# EAGLE board working (EAGLE 6.5.0)
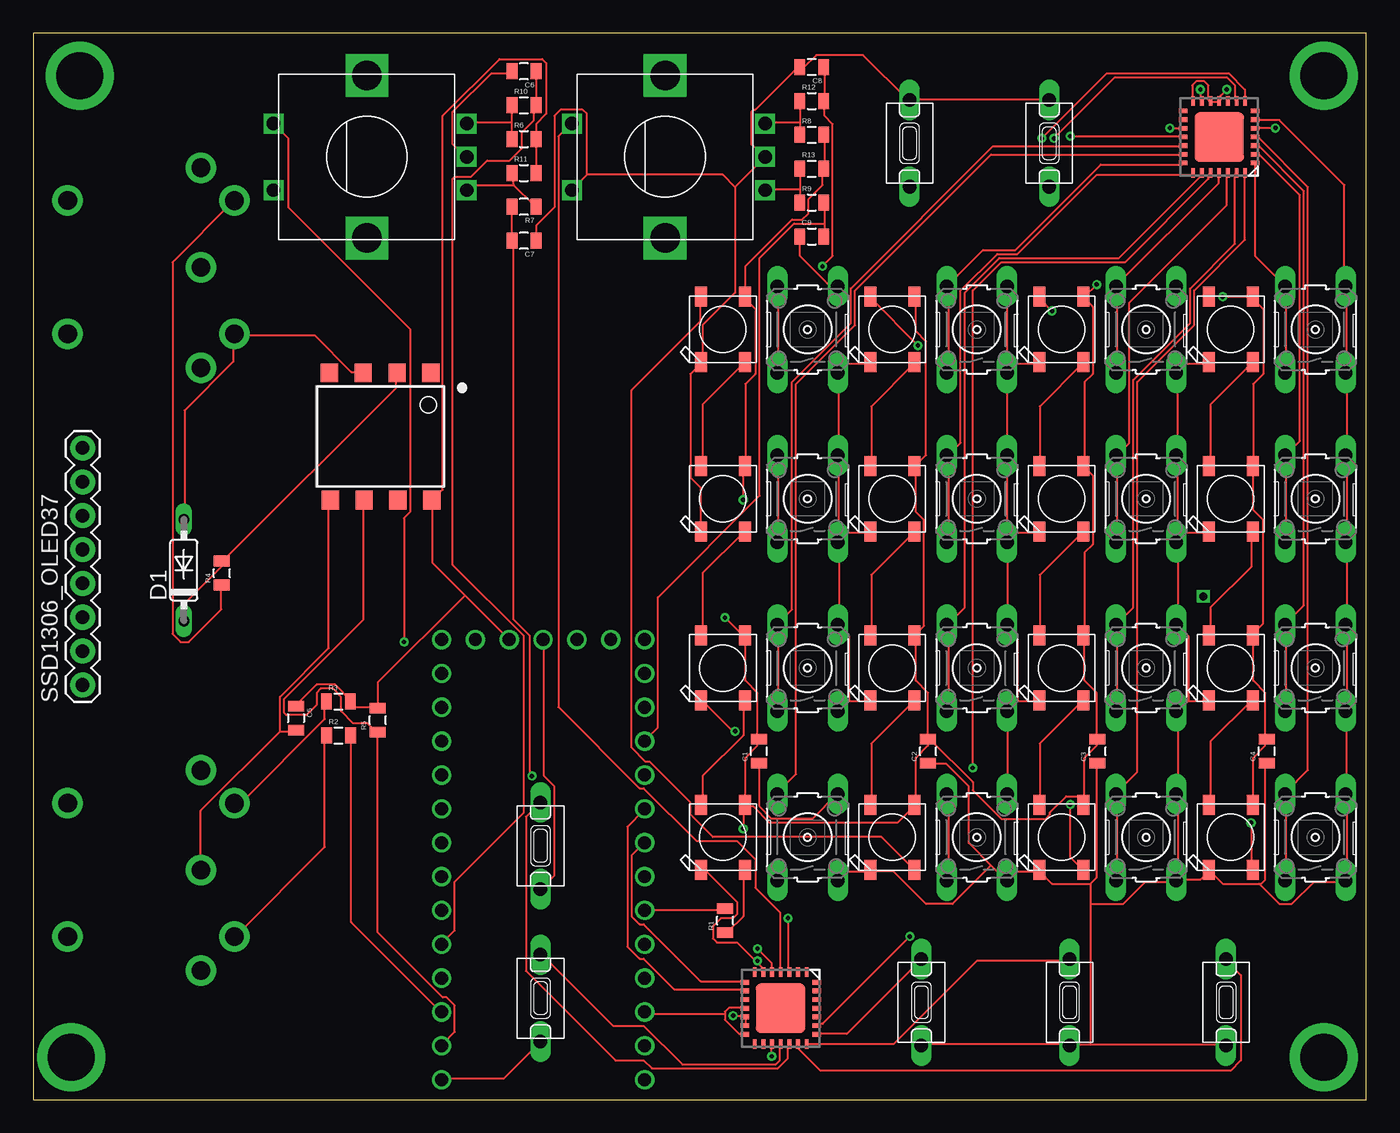
[diagram p0: board, top side]
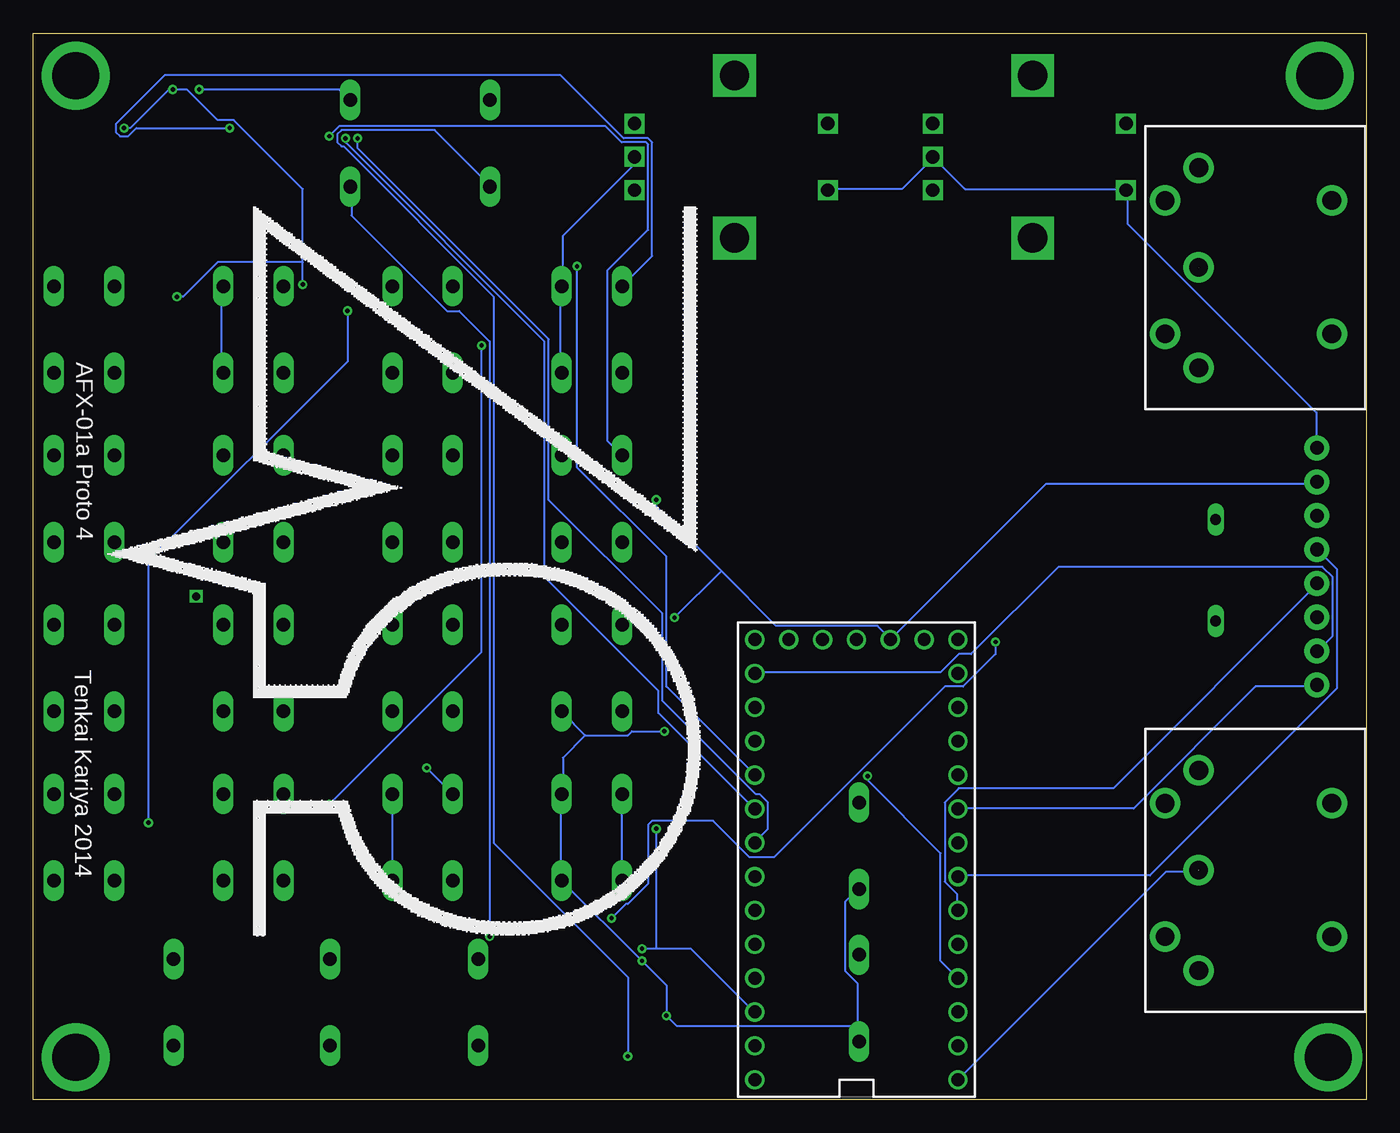
[diagram p1: board, bottom side, seen from below]

Size 100 x 80 mm. Coordinates in mm from the lower left corner, seen from the top.
Outline: 100,80 0,80 0,0 100,0 100,80
Copper layers (1*16): Top 0.0356mm / dielectric 1.5011mm / Bottom 0.0356mm
Design rules "LaenPCBOrder": minimum track width 6mil, minimum drill 13mil, track to track 6mil, track to pad 6mil, pad to pad 6mil, via to via 6mil, smd to smd 6mil, copper to edge 15mil, drill to drill 6mil, minimum pad ring 7mil, minimum via ring 7mil, stop-mask expansion 3mil, vias tented up to drill 0mil, thermal gap 10mil

## Footprints (pad centres in the part's own frame; a part is rotated, then mirrored left to right if it is on the bottom)
0805 = smd 0.8 x 1.2: 1 -0.9,0; 2 0.9,0
DO35-7 = drill 0.813 long: A 3.81,0; C -3.81,0
WS2812B = smd 1.5 x 0.9: 1-VDD 2.45,-1.65; 2-DOUT 2.45,1.65; 3-GND -2.45,1.65; 4-DIN -2.45,-1.65
QFN28-ML_6X6MM = smd 0.7 x 0.35: 1 -2.7,1.95; 2 -2.7,1.3; 3 -2.7,0.65; 4 -2.7,0; 5 -2.7,-0.65; 6 -2.7,-1.3; 7 -2.7,-1.95; 15 2.7,-1.95; 16 2.7,-1.3; 17 2.7,-0.65; 18 2.7,0; 19 2.7,0.65; 20 2.7,1.3; 21 2.7,1.95 | smd 0.35 x 0.7: 8 -1.95,-2.7; 9 -1.3,-2.7; 10 -0.65,-2.7; 11 0,-2.7; 12 0.65,-2.7; 13 1.3,-2.7; 14 1.95,-2.7; 22 1.95,2.7; 23 1.3,2.7; 24 0.65,2.7; 25 0,2.7; 26 -0.65,2.7; 27 -1.3,2.7; 28 -1.95,2.7 | smd 3.7 x 3.7: EXP 0,0
B3F-10XX = drill 1.016 long: 1 -3.251,2.261; 2 3.251,2.261; 3 -3.251,-2.261; 4 3.251,-2.261
B3F-10XX' = drill 1.016 long: 1 -3.251,2.261; 2 3.251,2.261
1X08_ROUND = drill 1.016 pad 1.88: 1 0,0; 2 2.54,0; 3 5.08,0; 4 7.62,0; 5 10.16,0; 6 12.7,0; 7 15.24,0; 8 17.78,0
ALPS_EC12E_SW = drill 1 square: A -2.5,-7.5; B 2.5,-7.5; C 0,-7.5; D -2.5,7; E 2.5,7 | drill 2.2 square: GND1 -6.1,0; GND2 6.1,0
8-SMD = smd 1.3 x 1.4: 1 -3.96,-4.96; 2 -1.42,-4.96; 3 1.12,-4.96; 4 3.66,-4.96; 5 3.59,4.58; 6 1.05,4.58; 7 -1.49,4.58; 8 -4.03,4.58
TEENSY_3.1_BASIC = drill 0.965: 0 -7.62,13.97; 1 -7.62,11.43; 2 -7.62,8.89; 3 -7.62,6.35; 3.3V 7.62,11.43; 3.3V1 -2.54,-16.51; 4 -7.62,3.81; 5 -7.62,1.27; 6 -7.62,-1.27; 7 -7.62,-3.81; 8 -7.62,-6.35; 9 -7.62,-8.89; 10 -7.62,-11.43; 11 -7.62,-13.97; 12 -7.62,-16.51; 13 7.62,-16.51; 14/A0 7.62,-13.97; 15/A1 7.62,-11.43; 16/A2 7.62,-8.89; 17/A3 7.62,-6.35; 18/A4 7.62,-3.81; 19/A5 7.62,-1.27; 20/A6 7.62,1.27; 21/A7 7.62,3.81; 22/A8 7.62,6.35; 23/A9 7.62,8.89; A14 5.08,-16.51; AGND 7.62,13.97; GND -7.62,16.51; GND1 0,-16.51; PGM 2.54,-16.51; VBAT -5.08,-16.51; VIN 7.62,16.51
DIN_5_FEMALE_SUPPORT = drill 1.4 pad 2.286: 1 7.94,3.6; 2 0.46,3.61; 3 -7.07,3.6; 4 5.47,6.13; 5 -4.53,6.12; 6 -4.53,-6.382; 7 5.478,-6.382

## Placement (x,y rotation side)
C1  100uF  [0805]  54.44,26.13 90 top
C2  100uF  [0805]  67.13,26.13 90 top
C3  100uF  [0805]  79.83,26.13 90 top
C4  100uF  [0805]  92.53,26.13 90 top
C5  100uF  [0805]  19.71,28.62 270 top
C6  0.01uF  [0805]  36.82,77.14 180 top
C7  0.01uF  [0805]  36.82,64.44 180 top
C8  0.01uF  [0805]  58.41,77.46 180 top
C9  0.01uF  [0805]  58.41,64.76 0 top
D1  1N4148DO35-7  [DO35-7]  11.29,39.72 90 top
L1  WS2812B  [WS2812B]  51.74,19.68 90 top
L2  WS2812B  [WS2812B]  51.74,32.38 90 top
L3  WS2812B  [WS2812B]  51.74,45.07 90 top
L4  WS2812B  [WS2812B]  51.74,57.77 90 top
L5  WS2812B  [WS2812B]  64.44,19.68 90 top
L6  WS2812B  [WS2812B]  64.44,32.38 90 top
L7  WS2812B  [WS2812B]  64.44,45.07 90 top
L8  WS2812B  [WS2812B]  64.44,57.77 90 top
L9  WS2812B  [WS2812B]  77.14,19.68 90 top
L10  WS2812B  [WS2812B]  77.14,32.38 90 top
L11  WS2812B  [WS2812B]  77.14,45.07 90 top
L12  WS2812B  [WS2812B]  77.14,57.77 90 top
L13  WS2812B  [WS2812B]  89.84,19.68 90 top
L14  WS2812B  [WS2812B]  89.84,32.38 90 top
L15  WS2812B  [WS2812B]  89.84,45.07 90 top
L16  WS2812B  [WS2812B]  89.84,57.77 90 top
MCP0  MCP23017ML  [QFN28-ML_6X6MM]  88.97,72.22 180 top
MCP1  MCP23017ML  [QFN28-ML_6X6MM]  56.07,6.85 270 top
R1  500  [0805]  51.9,13.43 90 top
R2  220  [0805]  22.9,27.31 0 top
R3  220  [0805]  22.89,29.85 0 top
R4  220  [0805]  14.15,39.5 90 top
R5  270  [0805]  25.83,28.47 90 top
R6  10k  [0805]  36.82,72.06 0 top
R7  10k  [0805]  36.82,66.98 180 top
R8  10k  [0805]  58.41,72.38 0 top
R9  10k  [0805]  58.41,67.3 0 top
R10  10k  [0805]  36.82,74.6 0 top
R11  10k  [0805]  36.82,69.52 0 top
R12  10k  [0805]  58.41,74.92 0 top
R13  10k  [0805]  58.41,69.84 0 top
S1  [B3F-10XX]  58.09,19.68 90 top
S2  [B3F-10XX]  58.09,32.38 90 top
S3  [B3F-10XX]  58.09,45.07 90 top
S4  [B3F-10XX]  58.09,57.77 90 top
S5  [B3F-10XX]  70.79,19.68 90 top
S6  [B3F-10XX]  70.79,32.38 90 top
S7  [B3F-10XX]  70.79,45.07 90 top
S8  [B3F-10XX]  70.79,57.77 90 top
S9  [B3F-10XX]  83.49,19.68 90 top
S10  [B3F-10XX]  83.49,32.38 90 top
S11  [B3F-10XX]  83.49,45.07 90 top
S12  [B3F-10XX]  83.49,57.77 90 top
S13  [B3F-10XX]  96.19,19.68 90 top
S14  [B3F-10XX]  96.19,32.38 90 top
S15  [B3F-10XX]  96.19,45.07 90 top
S16  [B3F-10XX]  96.19,57.77 90 top
SS1  [B3F-10XX']  40.31,7.61 90 top
SS2  [B3F-10XX']  40.31,19.04 90 top
SS3  [B3F-10XX']  91.74,7.29 90 top
SS4  [B3F-10XX']  80,7.29 90 top
SS5  [B3F-10XX']  68.88,7.29 90 top
SS6  [B3F-10XX']  73.96,71.75 270 top
SS7  [B3F-10XX']  63.49,71.75 270 top
SSD1306_OLED37  [1X08_ROUND]  3.7,31.11 90 top
SW1  EC12E_SW  [ALPS_EC12E_SW]  25.02,70.74 90 top
SW2  EC12E_SW  [ALPS_EC12E_SW]  47.4,70.74 90 top
U1  6N138M  [8-SMD]  25.87,49.56 180 top
U$1  TEENSY_3.1_BASIC  [TEENSY_3.1_BASIC]  38.24,18 180 bottom
U$2  MIDI_CONN_FEMALE_SUPPORT  [DIN_5_FEMALE_SUPPORT]  8.96,16.75 90 bottom
U$3  MIDI_CONN_FEMALE_SUPPORT  [DIN_5_FEMALE_SUPPORT]  8.96,61.97 90 bottom

## Library data of the parts
C1-C9 = SparkFun-Capacitors; PROD_ID: CAP-11625
D1 = diode
L1-L16 = adafruit
MCP0 MCP1 = microchip; MF: MICROCHIP; MPN: MCP23017-E/ML; OC_FARNELL: unknown; OC_NEWARK: 31K2957
R1-R13 = SparkFun-Passives
S1-S16 = switch-omron; MPN: B3F-1000; OC_FARNELL: 176432; OC_NEWARK: 36M3542
SS1-SS7 = TenkaiLibrary
SSD1306_OLED37 U$2 U$3 = SparkFun-Connectors
SW1 SW2 = switch-alps; MPN: EC12E2424407; OC_FARNELL: 1520813; OC_NEWARK: 74M1068
U1 = SparkFun-DiscreteSemi; PROD_ID: IC-09482
U$1 = Teensy_3_Series_Board_v1.0

## Nets
AGND: U$1.AGND
GND: C1.1 C2.1 C3.1 C4.1 C5.2 C6.2 C7.1 C8.2 C9.1 L1.3-GND L2.3-GND L3.3-GND L4.3-GND L5.3-GND L6.3-GND L7.3-GND L8.3-GND L9.3-GND L10.3-GND L11.3-GND L12.3-GND L13.3-GND L14.3-GND L15.3-GND L16.3-GND MCP0.6 MCP0.13 MCP1.6 MCP1.12 MCP1.13 S1.3 S1.4 S2.3 S2.4 S3.3 S3.4 S4.3 S4.4 S5.3 S5.4 S6.3 S6.4 S7.3 S7.4 S8.3 S8.4 S9.3 S9.4 S10.3 S10.4 S11.3 S11.4 S12.3 S12.4 S13.3 S13.4 S14.3 S14.4 S15.3 S15.4 S16.3 S16.4 SS1.1 SS2.1 SS3.1 SS4.1 SS5.1 SS6.1 SS7.1 SSD1306_OLED37.8 SW1.C SW1.D SW2.C SW2.D U1.5 U$1.GND U$1.GND1 U$2.2
N$1: L1.2-DOUT L2.4-DIN
N$2: L2.2-DOUT L3.4-DIN
N$3: L3.2-DOUT L4.4-DIN
N$4: L5.2-DOUT L6.4-DIN
N$5: L6.2-DOUT L7.4-DIN
N$6: L7.2-DOUT L8.4-DIN
N$7: L9.2-DOUT L10.4-DIN
N$8: L10.2-DOUT L11.4-DIN
N$9: L11.2-DOUT L12.4-DIN
N$10: L13.2-DOUT L14.4-DIN
N$11: L14.2-DOUT L15.4-DIN
N$12: L15.2-DOUT L16.4-DIN
N$13: L4.2-DOUT L5.4-DIN
N$14: R2.1 U$2.5
N$15: R2.2 U$1.1
N$16: MCP0.20 S1.1 S1.2
N$17: MCP0.19 S2.1 S2.2
N$18: MCP0.18 S3.1 S3.2
N$19: MCP0.17 S4.1 S4.2
N$20: R1.2 U$1.21/A7
N$21: MCP0.24 S5.1 S5.2
N$22: MCP0.23 S6.1 S6.2
N$23: MCP0.22 S7.1 S7.2
N$24: MCP0.21 S8.1 S8.2
N$25: MCP0.28 S9.1 S9.2
N$26: MCP0.27 S10.1 S10.2
N$27: MCP0.26 S11.1 S11.2
N$28: MCP0.25 S12.1 S12.2
N$29: MCP0.4 S13.1 S13.2
N$30: MCP0.3 S14.1 S14.2
N$31: MCP0.2 S15.1 S15.2
N$32: MCP0.1 S16.1 S16.2
N$33: MCP0.8 MCP1.8 U$1.19/A5
N$34: MCP0.9 MCP1.9 U$1.18/A4
N$35: SSD1306_OLED37.1 U$1.7
N$36: SSD1306_OLED37.2 U$1.14/A0
N$37: SSD1306_OLED37.4 U$1.4
N$38: SSD1306_OLED37.5 U$1.5
N$39: L12.2-DOUT L13.4-DIN
N$40: R3.1 U$2.4
N$41: R8.1 R12.1 SW2.B
N$42: R9.1 R13.1 SW2.A
N$45: MCP1.4 SW2.E
N$46: MCP1.3 SW1.E
N$47: MCP1.17 SS7.2
N$48: MCP1.18 SS1.2
N$49: MCP1.19 SS2.2
N$50: MCP1.23 SS6.2
N$51: MCP1.22 SS5.2
N$52: MCP1.20 SS3.2
N$53: MCP1.21 SS4.2
N$54: L1.4-DIN R1.1
N$55: L8.2-DOUT L9.4-DIN
N$56: R4.1 U$3.4
N$57: D1.C R4.2 U1.2
N$58: D1.A U1.3 U$3.5
N$59: R5.1 U1.6 U$1.0
N$60: C6.1 R10.2 U$1.3
N$61: R6.1 R10.1 SW1.B
N$62: R7.1 R11.1 SW1.A
N$63: C7.2 R7.2 U$1.2
N$64: C8.1 R12.2 U$1.17/A3
N$65: C9.2 R9.2 U$1.16/A2
VBAT: U$1.VBAT
VCC: C1.2 C2.2 C3.2 C4.2 C5.1 L1.1-VDD L2.1-VDD L3.1-VDD L4.1-VDD L5.1-VDD L6.1-VDD L7.1-VDD L8.1-VDD L9.1-VDD L10.1-VDD L11.1-VDD L12.1-VDD L13.1-VDD L14.1-VDD L15.1-VDD L16.1-VDD MCP0.5 MCP0.11 MCP0.12 MCP0.14 MCP1.5 MCP1.11 MCP1.14 R3.2 R5.2 R6.2 R8.2 R11.2 R13.2 SSD1306_OLED37.7 U1.8 U$1.3.3V U$1.3.3V1
VIN: U$1.VIN

## Tracks (layer width: path | path; a pad name or v marks a point on that pad's centre or on a via)
GND  (via drill 0.33)
  Top 0.152: 41.53,69.38 41.53,73.95 41.22,74.26 39.55,74.26 39.09,73.8 39.09,66.94 37.72,65.57 37.72,64.51 C7.1 | 41.53,69.38 40.46,68.32 SW2.D | C6.2 35.89,77 34.37,77 31.47,74.11 31.47,71.67 32.39,70.75 SW1.C | L3.3-GND 50.06,42.71 50.06,45.91 49.3,46.67 49.3,54.45 50.06,55.21 L4.3-GND 50.22,55.36 50.22,58.1 52.65,60.54 52.65,68.47 | v87.55,75.78 87.55,75.02 MCP0.13 | SS6.1 76.12,75.02 65.76,75.02 SS7.1 65.61,75.02 62.26,78.37 58.75,78.37 57.84,77.46 C8.2 57.38,77.46 54.18,74.26 54.03,74.26 53.87,74.11 53.87,71.67 54.79,70.75 SW2.C 54.79,70.6 52.65,68.47 | 41.53,69.38 51.74,69.38 52.65,68.47 | 18.52,27.62 19.58,27.62 C5.2 | 18.52,27.62 12.57,21.68 12.57,17.26 U$2.2 | 18.52,27.62 18.52,30.22 22.17,33.87 22.17,44.85 U1.5 | U$1.GND 30.71,1.57 35.28,1.57 38.02,4.31 SS1.1 | U$1.GND1 38.33,34.48 38.33,24.27 39.09,23.51 39.09,16.8 38.18,15.89 SS2.1 | 54.18,10.4 52.81,11.78 51.28,11.78 50.98,12.08 50.98,13 51.59,13.6 52.5,13.6 52.81,13.91 52.81,14.82 50.52,17.11 50.22,17.11 L1.3-GND | 54.18,10.4 54.64,9.95 54.64,9.64 MCP1.6 | MCP1.13 53.42,5.68 53.42,6.14 MCP1.12 53.26,6.29 v52.5,6.29 | S1.3 61.04,17.11 62.71,17.11 L5.3-GND 62.87,17.11 64.54,17.11 66.98,14.67 68.96,14.67 71.86,17.57 | v54.33,10.4 54.18,10.4 | C1.1 54.48,25.19 54.48,21.99 55.4,21.07 58.45,21.07 60.27,22.9 S1.4 | v52.65,27.62 52.5,27.62 50.22,29.91 L2.3-GND | 61.19,29.91 62.71,29.91 L6.3-GND | 61.19,29.91 60.43,29.15 S2.3 | C9.1 57.53,64.66 57.53,63.29 59.66,61.15 60.27,61.15 S4.4 | L8.3-GND 62.71,55.21 61.04,55.21 S4.3 60.43,54.45 60.43,48.35 S3.4 60.43,48.2 60.43,43.17 61.04,42.56 | 61.04,42.56 62.71,42.56 L7.3-GND
  Top 0.152: 61.04,42.56 60.43,41.95 S3.3 | S3.3 60.43,41.8 60.43,35.7 S2.4 61.19,34.79 61.19,29.91 | 61.04,42.56 S3.3 | MCP0.6 91.67,73.5 93.5,73.5 98.37,68.62 98.37,61.15 S16.4 98.53,61 98.53,54.6 S16.3 98.53,54.45 98.53,48.35 S15.4 98.53,48.2 98.53,41.95 S15.3 98.53,41.8 98.53,35.7 S14.4 98.53,35.55 98.53,29.15 S14.3 98.53,29 98.53,23.05 S13.4 98.53,22.9 98.53,16.5 S13.3 98.37,16.35 96.09,16.35 94.41,14.67 93.5,14.67 91.97,16.2 | 91.97,16.2 89.23,16.2 88.32,17.11 L13.3-GND 88.16,17.11 87.55,16.5 85.88,16.5 | 91.97,16.2 92.13,16.2 92.43,16.5 92.43,25.19 C4.1 | L16.3-GND 88.16,55.21 86.49,55.21 85.88,54.6 S12.3 85.88,54.45 85.88,48.35 S11.4 85.88,48.2 85.88,43.17 86.49,42.56 | 86.64,29.91 88.16,29.91 L14.3-GND | 86.64,29.91 85.88,29.15 S10.3 85.88,29 85.88,23.05 S9.4 85.88,22.9 85.88,16.5 | 86.49,42.56 88.16,42.56 L15.3-GND | 86.49,42.56 S11.3 85.88,41.8 85.88,35.7 S10.4 85.88,35.55 86.64,34.79 86.64,29.91 | 85.88,16.5 S9.3 85.73,16.35 83.44,16.35 81.76,14.67 79.32,14.67 | SS5.1 66.68,4.16 77.65,4.16 SS4.1 77.8,4.16 79.32,4.16 | 79.32,4.16 89.38,4.16 SS3.1 | 79.32,16.2 79.78,16.65 79.78,25.19 C3.1 | 79.32,16.2 76.43,16.2 75.51,17.11 L9.3-GND 75.36,17.11 73.69,17.11 73.08,16.5 S5.3 72.92,16.5 71.86,17.57 | 71.86,17.57 70.18,19.24 70.18,23.51 68.5,25.19 67.28,25.19 C2.1 | 73.69,55.21 75.36,55.21 L12.3-GND | 73.69,55.21 73.08,54.6 S8.3 | 73.69,55.21 73.08,55.82 73.08,61 S8.4 | 73.69,55.21 S8.3 | 73.84,29.91 75.36,29.91 L10.3-GND | 73.84,29.91 S6.3 73.08,29 73.08,23.05 S5.4 | 73.69,42.56 75.36,42.56 L11.3-GND | 73.69,42.56 73.08,41.95 S7.3 | S7.3 73.08,41.8 73.08,35.7 S6.4 73.08,35.55 73.84,34.79 73.84,29.91
  Top 0.152: 73.69,42.56 73.08,43.17 73.08,48.2 S7.4 73.08,48.35 73.08,54.45 S8.3 | 73.69,42.56 S7.3 | 79.32,16.2 79.32,14.67 | 79.32,14.67 79.32,4.16
  Bottom 0.152: SSD1306_OLED37.8 3.73,48.96 3.73,51.55 17.91,65.73 17.91,68.16 SW1.D 18.06,68.32 30.1,68.32 32.39,70.6 SW1.C 32.54,70.6 34.82,68.32 40.31,68.32 SW2.D | v87.55,75.78 77.04,75.78 76.28,75.02 SS6.1 | 38.18,5.53 38.18,8.73 39.09,9.64 39.09,14.82 38.18,15.74 SS2.1 | 38.18,5.53 38.18,4.46 SS1.1 38.18,5.53 | U$2.2 12.57,17.11 15.01,17.11 30.56,1.57 U$1.GND | v52.65,27.62 55.09,27.62 55.4,27.32 58.6,27.32 | 58.6,27.32 60.27,29 S2.3 | 58.6,27.32 60.27,25.64 60.27,23.05 S1.4 60.43,22.9 60.43,16.5 S1.3 v54.33,10.4 52.5,8.58 v52.5,6.29 51.74,5.53 38.18,5.53 | S4.3 60.43,54.6 60.43,61 S4.4 60.27,61.15 60.27,64.81 54.94,70.15 54.94,70.6 SW2.C | S12.4 85.88,61 85.88,54.6 S12.3 | S5.3 73.08,16.5 73.08,22.9 S5.4
N$1
  Top 0.152: L1.2-DOUT 50.22,22.14 50.22,24.27 53.26,27.32 53.26,29.91 L2.4-DIN
N$2
  Top 0.152: L2.2-DOUT 50.22,34.94 50.22,39.51 53.26,42.56 L3.4-DIN
N$3
  Top 0.152: L3.2-DOUT 50.22,47.59 50.22,52.16 53.26,55.21 L4.4-DIN
N$4
  Top 0.152: L5.2-DOUT 62.87,22.14 62.87,26.71 66.07,29.91 L6.4-DIN
N$5
  Top 0.152: L6.2-DOUT 62.87,34.94 62.87,39.36 66.07,42.56 L7.4-DIN
N$6
  Top 0.152: L7.2-DOUT 62.87,47.59 62.87,52.01 66.07,55.21 L8.4-DIN
N$7
  Top 0.152: L9.2-DOUT 75.51,22.14 75.51,26.71 78.71,29.91 L10.4-DIN
N$8
  Top 0.152: L10.2-DOUT 75.51,34.94 75.51,39.36 78.71,42.56 L11.4-DIN
N$9
  Top 0.152: L11.2-DOUT 75.51,47.59 75.51,52.01 78.71,55.21 L12.4-DIN
N$10
  Top 0.152: L13.2-DOUT 88.32,22.14 88.32,26.86 91.36,29.91 L14.4-DIN
N$11
  Top 0.152: L14.2-DOUT 88.32,34.94 88.32,36.92 91.36,39.97 91.36,42.56 L15.4-DIN
N$12
  Top 0.152: L15.2-DOUT 88.32,47.59 88.32,52.16 91.36,55.21 L16.4-DIN
N$13
  Top 0.152: L4.2-DOUT 50.06,60.09 50.06,58.41 44.88,53.23 44.88,26.41 45.95,25.34 46.25,25.34 49.3,22.29 49.3,21.38 50.98,19.7 63.63,19.7 66.07,17.26 L5.4-DIN
N$14
  Top 0.152: R2.1 21.87,27.17 21.87,18.94 15.16,12.23 U$2.5
N$15
  Top 0.152: R2.2 23.85,27.17 23.85,13.3 30.56,6.59 U$1.1
N$16
  Top 0.152: MCP0.20 86.18,70.91 71.86,70.91 61.65,60.7 61.65,58.1 57.23,53.69 57.23,24.43 55.85,23.05 S1.2
  Bottom 0.152: S1.1 55.85,16.5 55.85,22.9 S1.2
N$17
  Top 0.152: MCP0.19 86.18,71.52 72.01,71.52 61.34,60.85 61.34,58.26 56.92,53.84 56.92,36.77 55.85,35.7 S2.2 55.85,35.55 55.85,29.15 S2.1
N$18  (via drill 0.33)
  Top 0.152: v77.8,72.28 86.18,72.28 MCP0.18 | S3.1 55.85,41.95 55.85,48.2 S3.2
  Bottom 0.152: v77.8,72.28 77.04,73.04 57.07,73.04 55.85,71.82 54.03,71.82 53.87,71.67 53.87,65.27 56.92,62.22 56.92,49.42 S3.2
N$19  (via drill 0.33)
  Top 0.152: v85.27,72.89 86.18,72.89 MCP0.17 | S4.1 55.85,54.6 55.85,61 S4.2
  Bottom 0.152: v85.27,72.89 92.28,72.89 92.89,72.28 93.5,72.28 93.8,72.58 93.8,73.19 90.14,76.85 60.43,76.85 55.7,72.13 53.87,72.13 53.57,71.82 53.57,63.29 S4.2
N$20
  Top 0.152: R1.2 51.89,14.21 45.95,14.21 U$1.21/A7
N$21  (via drill 0.33)
  Top 0.152: v70.49,24.88 70.49,60.7 72.62,62.83 81.92,62.83 88.16,69.08 88.16,69.38 MCP0.24 | S5.1 68.66,16.5 68.66,22.9 S5.2
  Bottom 0.152: S5.2 v70.49,24.88
N$22
  Top 0.152: MCP0.23 87.55,69.38 87.55,69.23 81.46,63.13 72.47,63.13 69.88,60.54 69.88,36.92 68.66,35.7 S6.2 68.66,35.55 68.66,29.15 S6.1
N$23
  Top 0.152: MCP0.22 86.94,69.38 79.78,69.38 73.84,63.44 72.31,63.44 69.57,60.7 69.57,49.27 68.66,48.35 S7.2 68.66,48.2 68.66,41.95 S7.1
N$24
  Top 0.152: MCP0.21 86.18,70.15 80.09,70.15 73.69,63.74 71.25,63.74 S8.2 68.66,61 68.66,54.6 S8.1
N$25
  Top 0.152: MCP0.28 90.91,69.38 90.91,64.51 87.1,60.7 87.1,58.1 82.83,53.84 82.83,24.58 81.31,23.05 S9.2 81.31,22.9 81.31,16.5 S9.1
N$26
  Top 0.152: MCP0.27 90.14,69.38 90.14,64.2 86.79,60.85 86.79,58.26 82.52,53.99 82.52,36.92 S10.2 81.31,35.55 81.31,29.15 S10.1
N$27
  Top 0.152: MCP0.26 89.54,69.38 89.54,67.1 82.22,59.78 82.22,49.27 81.31,48.35 S11.2 81.31,48.2 81.31,41.95 S11.1
N$28
  Top 0.152: MCP0.25 88.93,69.38 88.93,68.77 81.31,61.15 S12.2 81.31,61 81.31,54.6 S12.1
N$29
  Top 0.152: MCP0.4 91.67,72.13 91.97,72.13 95.63,68.47 95.63,24.73 93.95,23.05 S13.2 93.95,22.9 93.95,16.5 S13.1
N$30
  Top 0.152: MCP0.3 91.67,71.52 91.97,71.52 95.33,68.16 95.33,37.07 93.95,35.7 S14.2 93.95,35.55 93.95,29.15 S14.1
N$31
  Top 0.152: MCP0.2 91.67,70.91 91.97,70.91 95.02,67.86 95.02,49.42 S15.2 93.95,48.2 93.95,41.95 S15.1
N$32
  Top 0.152: MCP0.1 91.67,70.15 91.67,63.29 S16.2 93.95,61 93.95,54.6 S16.1
N$33  (via drill 0.33)
  Top 0.152: MCP1.8 53.26,8.88 50.06,8.88 45.8,13.15 45.49,13.15 44.88,13.76 44.88,18.33 45.8,19.24 U$1.19/A5 | v75.67,72.13 80.54,77 89.69,77 90.91,75.78 90.91,75.02 MCP0.8
  Bottom 0.152: v75.67,72.13 75.67,71.36 61.34,57.04 61.34,45 52.81,36.46 52.81,29.91 45.8,22.9 45.49,22.9 44.88,22.29 44.88,20.31 45.8,19.4 U$1.19/A5
N$34  (via drill 0.33)
  Top 0.152: MCP1.9 53.26,8.27 48.08,8.27 45.8,10.56 45.49,10.56 44.58,11.47 44.58,20.46 45.8,21.68 U$1.18/A4 | v76.58,72.13 81.15,76.7 89.54,76.7 90.14,76.09 90.14,75.02 MCP0.9
  Bottom 0.152: v76.58,72.13 76.58,71.82 61.65,56.89 61.65,39.21 53.11,30.67 53.11,29 45.95,21.83 U$1.18/A4
N$35
  Bottom 0.152: U$1.7 30.56,21.83 17.45,21.83 8.31,30.98 3.73,30.98 SSD1306_OLED37.1
N$36
  Bottom 0.152: U$1.14/A0 45.8,32.04 31.93,32.04 30.56,33.42 29.64,33.42 23.09,39.97 3.28,39.97 2.51,39.21 2.51,34.79 3.58,33.72 SSD1306_OLED37.2
N$37
  Bottom 0.152: U$1.4 30.71,14.21 30.71,15.43 31.62,16.35 31.62,22.29 30.56,23.36 18.97,23.36 3.73,38.6 SSD1306_OLED37.4
N$38
  Bottom 0.152: U$1.5 30.56,16.8 16.23,16.8 2.21,30.83 2.21,39.82 3.58,41.19 SSD1306_OLED37.5
N$39  (via drill 0.33)
  Top 0.152: v91.36,20.77 91.36,17.26 L13.4-DIN | v76.43,59.17 75.51,60.09 L12.2-DOUT
  Bottom 0.152: v91.36,20.77 91.36,40.43 76.43,55.36 v76.43,59.17
N$40
  Top 0.152: R3.1 21.87,29.76 21.87,28.54 15.62,22.29 15.16,22.29 U$2.4
N$41
  Top 0.152: 57.53,73.34 57.53,74.87 R12.1 | 57.53,73.34 57.53,72.43 R8.1 | 57.53,73.34 54.94,73.34 SW2.B
N$42
  Top 0.152: 57.53,68.32 57.53,69.84 R13.1 | 57.53,68.32 57.53,67.4 R9.1 | 57.53,68.32 54.94,68.32 SW2.A
N$43  (via drill 3.51 pad 5.08)
  other vias: 96.82,3.17
N$44  (via drill 3.51 pad 5.08)
  other vias: 3.48,76.83
N$45
  Top 0.152: MCP1.4 56.01,9.64 56.01,14.06 54.18,15.89 54.18,18.02 52.81,19.4 49.76,19.4 45.8,23.36 45.49,23.36 39.4,29.45 39.4,72.28 40.31,73.19 SW2.E
N$46  (via drill 0.33)
  Top 0.152: v56.62,13.6 56.62,9.64 MCP1.3 | v27.81,34.33 27.81,43.63 28.27,44.08 28.27,57.8 19.13,66.94 19.13,72.13 18.06,73.19 SW1.E
  Bottom 0.152: v56.62,13.6 55.55,14.67 55.4,14.67 53.87,16.2 53.87,20.61 53.57,20.92 49,20.92 46.25,18.18 44.42,18.18 31.62,30.98 30.25,30.98 27.81,33.42 v27.81,34.33
N$47  (via drill 0.33)
  Top 0.152: v55.4,3.24 55.4,4 MCP1.17
  Bottom 0.152: v55.4,3.24 55.4,9.19 65.46,19.24 65.46,60.24 76.73,71.52 76.89,71.52 77.19,71.82 77.19,72.43 76.89,72.74 69.88,72.74 65.76,68.62 SS7.2
N$48
  Top 0.152: MCP1.18 56.01,4 56.01,2.94 55.7,2.63 48.69,2.63 45.8,5.53 43.51,5.53 38.18,10.86 SS1.2
N$49
  Top 0.152: MCP1.19 56.62,4 56.62,3.09 55.85,2.33 46.41,2.33 45.8,2.94 43.66,2.94 36.96,9.64 36.96,21.22 38.02,22.29 SS2.2
N$50  (via drill 0.33)
  Top 0.152: v65.76,12.23 59.21,5.68 58.9,5.68 MCP1.23
  Bottom 0.152: v65.76,12.23 65.76,56.89 68.05,59.17 68.96,59.17 76.12,66.34 76.12,68.47 SS6.2
N$51
  Top 0.152: MCP1.22 58.9,4.92 61.04,4.92 66.52,10.4 SS5.2
N$52
  Top 0.152: MCP1.20 57.38,4 57.38,3.85 59.06,2.17 89.84,2.17 90.6,2.94 90.6,9.34 89.54,10.4 SS3.2
N$53
  Top 0.152: MCP1.21 58.14,4.16 64.54,4.16 70.79,10.4 77.65,10.4 SS4.2
N$54
  Top 0.152: R1.1 52.04,12.54 53.26,13.76 53.26,17.11 L1.4-DIN
N$55  (via drill 0.33)
  Top 0.152: v66.37,56.58 62.87,60.09 L8.2-DOUT | v77.8,22.14 77.8,18.18 78.71,17.26 L9.4-DIN
  Bottom 0.152: v66.37,56.58 66.37,33.57 v77.8,22.14
N$56
  Top 0.152: R4.1 14.1,38.6 14.1,36.77 11.66,34.33 11.05,34.33 10.44,34.94 10.44,62.83 15.01,67.4 U$3.4
N$57
  Top 0.152: D1.C 11.35,36.01 11.35,37.23 14.1,39.97 14.1,40.27 R4.2 14.25,40.43 27.2,53.38 27.2,54.45 U1.2
N$58
  Top 0.152: U1.3 24.61,54.6 23.85,54.6 21.11,57.34 15.16,57.34 U$3.5 15.01,57.34 15.01,55.36 11.35,51.7 11.35,43.63 D1.A
N$59
  Top 0.152: U$1.0 30.71,4.16 31.62,5.07 31.62,7.05 31.01,7.66 30.71,7.66 25.83,12.54 25.83,27.47 R5.1 25.68,27.62 25.07,28.23 24,28.23 23.09,29.15 23.09,30.22 22.48,30.83 21.56,30.83 21.26,30.52 21.26,29.61 20.5,28.84 18.97,28.84 18.82,29 18.82,30.06 24.77,36.01 24.77,44.85 U1.6
N$60
  Top 0.152: C6.1 37.72,77 37.72,74.72 R10.2 37.57,74.56 37.57,73.5 36.65,72.58 36.65,71.36 35.74,70.45 34.06,70.45 32.84,69.23 31.62,69.23 31.47,69.08 31.47,40.12 36.8,34.79 36.8,21.53 31.62,16.35 31.62,12.69 30.71,11.78 U$1.3
N$61
  Top 0.152: 35.89,73.34 35.89,74.56 R10.1 | 35.89,73.34 35.89,72.13 R6.1 | 35.89,73.34 32.54,73.34 SW1.B
N$62
  Top 0.152: 36.04,68.62 36.04,69.38 R11.1 | 36.04,68.62 37.57,67.1 R7.1 | 36.04,68.62 32.84,68.62 32.54,68.32 SW1.A
N$63  (via drill 0.33)
  Top 0.152: R7.2 35.89,66.94 35.89,64.51 C7.2 36.04,64.35 36.04,36.01 37.26,34.79 37.26,24.43 v37.41,24.27
  Bottom 0.152: v37.41,24.27 37.41,23.97 31.93,18.48 31.93,10.4 30.71,9.19 U$1.2
N$64  (via drill 0.33)
  Top 0.152: C8.1 59.36,77.46 59.36,75.02 R12.2 59.36,74.87 59.36,73.8 59.97,73.19 59.97,63.29 v59.21,62.52
  Bottom 0.152: v59.21,62.52 59.21,47.44 52.5,40.73 52.5,30.98 45.95,24.43 U$1.17/A3
N$65
  Top 0.152: 59.36,65.73 59.36,67.25 R9.2 | 59.36,65.73 59.36,64.81 C9.2 | 59.36,65.73 57.07,65.73 54.48,63.13 54.48,45.3 46.86,37.68 46.86,27.93 45.95,27.02 U$1.16/A2
N$66  (via drill 3.51 pad 5.08)
  other vias: 2.84,3.17
N$67  (via drill 3.51 pad 5.08)
  other vias: 96.82,76.83
N$70  (via drill 0.6)
  other vias: 87.78,37.76
VCC  (via drill 0.33)
  Top 0.152: R8.2 59.36,72.28 59.36,69.84 R13.2 59.21,69.84 59.21,68.62 58.14,67.55 58.14,66.49 57.68,66.03 56.92,66.03 53.42,62.52 53.42,60.24 L4.1-VDD 53.42,60.09 54.18,59.32 54.18,54.45 53.42,53.69 53.42,47.59 L3.1-VDD 53.26,47.44 v53.26,45 | C5.1 19.74,29.61 21.26,31.13 22.63,31.13 23.85,29.91 R3.2 23.85,29.76 24.16,29.45 25.68,29.45 R5.2 25.83,29.45 25.83,31.28 32.39,37.84 | R11.2 37.72,69.54 37.72,71.97 R6.2 37.72,72.13 37.72,73.19 38.48,73.95 38.48,77.77 38.18,78.07 34.98,78.07 30.71,73.8 30.71,45.76 29.95,45 U1.8 29.95,44.85 29.95,40.27 32.39,37.84 | 32.39,37.84 35.59,34.64 U$1.3.3V1 | L13.1-VDD 91.52,22.14 91.52,25.64 92.43,26.56 92.43,27.02 C4.2 92.43,27.17 92.43,30.52 91.52,31.43 91.52,34.79 L14.1-VDD 91.52,34.94 92.28,35.7 92.28,43.47 91.52,44.24 91.52,47.44 L15.1-VDD 91.52,47.59 91.52,53.69 92.28,54.45 92.28,59.32 91.52,60.09 L16.1-VDD 91.36,60.24 v89.23,60.24 | 78.87,22.75 78.87,22.14 L9.1-VDD 78.87,22.75 | 78.87,22.75 78.87,25.64 79.78,26.56 79.78,27.02 C3.2 79.78,27.17 79.78,30.52 78.87,31.43 78.87,34.79 L10.1-VDD 78.87,34.94 78.87,41.04 79.48,41.65 79.48,46.83 78.87,47.44 L11.1-VDD 78.87,47.59 78.87,53.84 79.48,54.45 79.48,59.48 78.87,60.09 L12.1-VDD 78.87,60.24 v79.78,61.15 | MCP0.14 86.94,75.02 86.94,76.09 87.25,76.39 87.86,76.39 88.16,76.09 88.16,75.02 MCP0.12 88.32,74.87 88.93,74.87 MCP0.11 89.08,75.02 89.08,75.33 v89.54,75.78 | v93.19,72.89 91.67,72.89 MCP0.5 | 51.89,6.44 51.89,6.59 52.2,6.9 53.26,6.9 MCP1.11 | 51.89,6.44 51.89,5.98 52.96,4.92 53.26,4.92 MCP1.14 | v54.33,11.32 55.4,10.25 55.4,9.64 MCP1.5
  Top 0.152: 51.89,6.44 45.95,6.44 U$1.3.3V | L1.1-VDD 53.42,22.14 53.42,25.64 54.33,26.56 54.33,27.02 C1.2 54.33,27.17 54.33,30.52 53.42,31.43 53.42,34.79 L2.1-VDD 53.26,34.79 v51.89,36.16 | C2.2 67.13,27.02 67.13,26.56 66.22,25.64 66.22,22.14 L5.1-VDD 66.07,21.99 64.85,20.77 55.25,20.77 54.03,21.99 53.42,21.99 L1.1-VDD | C2.2 67.13,27.17 67.13,30.52 66.22,31.43 66.22,34.79 L6.1-VDD 66.22,34.94 66.83,35.55 66.83,43.47 66.22,44.08 66.22,47.44 L7.1-VDD 66.22,47.59 66.98,48.35 66.98,56.89 66.22,57.65 66.22,60.09 L8.1-VDD | v53.26,20.31 53.26,21.99 L1.1-VDD | 78.87,22.75 77.5,22.75 76.28,21.53 76.28,21.38 75.97,21.07 72.62,21.07 70.49,23.21 70.49,23.82 67.28,27.02 C2.2
  Bottom 0.152: SSD1306_OLED37.7 3.73,46.22 24,46.22 35.59,34.64 U$1.3.3V1 35.74,34.64 36.65,35.55 44.27,35.55 48.39,39.66 | v53.26,45 53.26,44.54 48.39,39.66 | v93.19,72.89 92.74,72.89 89.84,75.78 v89.54,75.78 88.47,75.78 86.18,73.5 84.96,73.5 79.78,68.32 79.78,62.83 | v79.78,61.15 79.78,62.83 | v89.23,60.24 88.77,60.24 86.18,62.83 79.78,62.83 | 53.26,11.32 50.67,11.32 45.95,6.59 U$1.3.3V | 53.26,11.32 v54.33,11.32 | v53.26,20.31 53.26,11.32 | v51.89,36.16 48.39,39.66

## Text on the board
bPlace: AFX-01a Proto 4 | Tenkai Kariya 2014
tStop: AFX-01a